# EAGLE board Controller Danu Kartiko K (EAGLE 9.6.1)
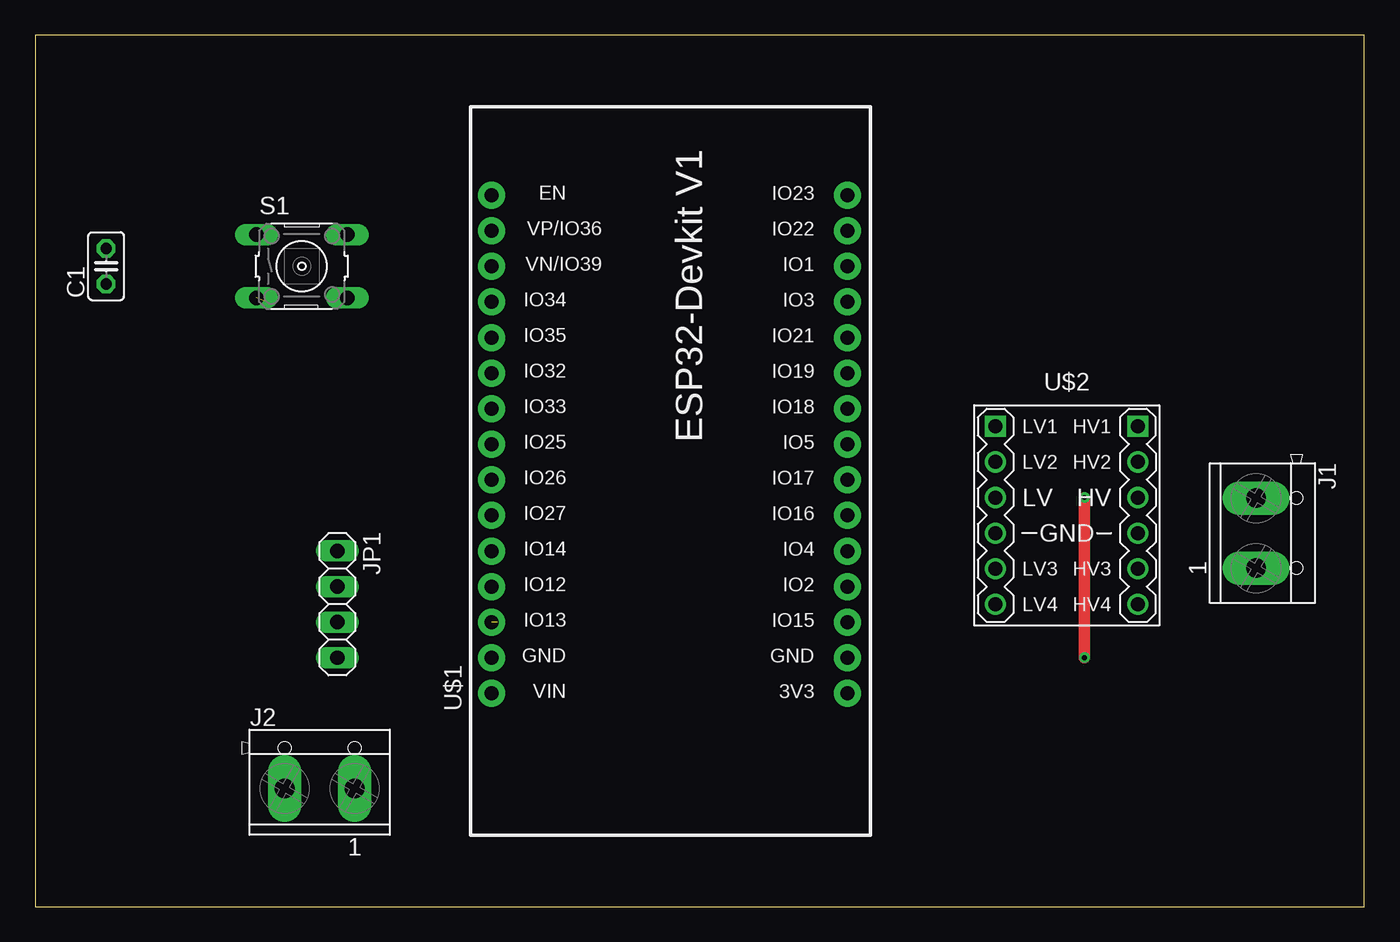
[diagram p0: board, top side]
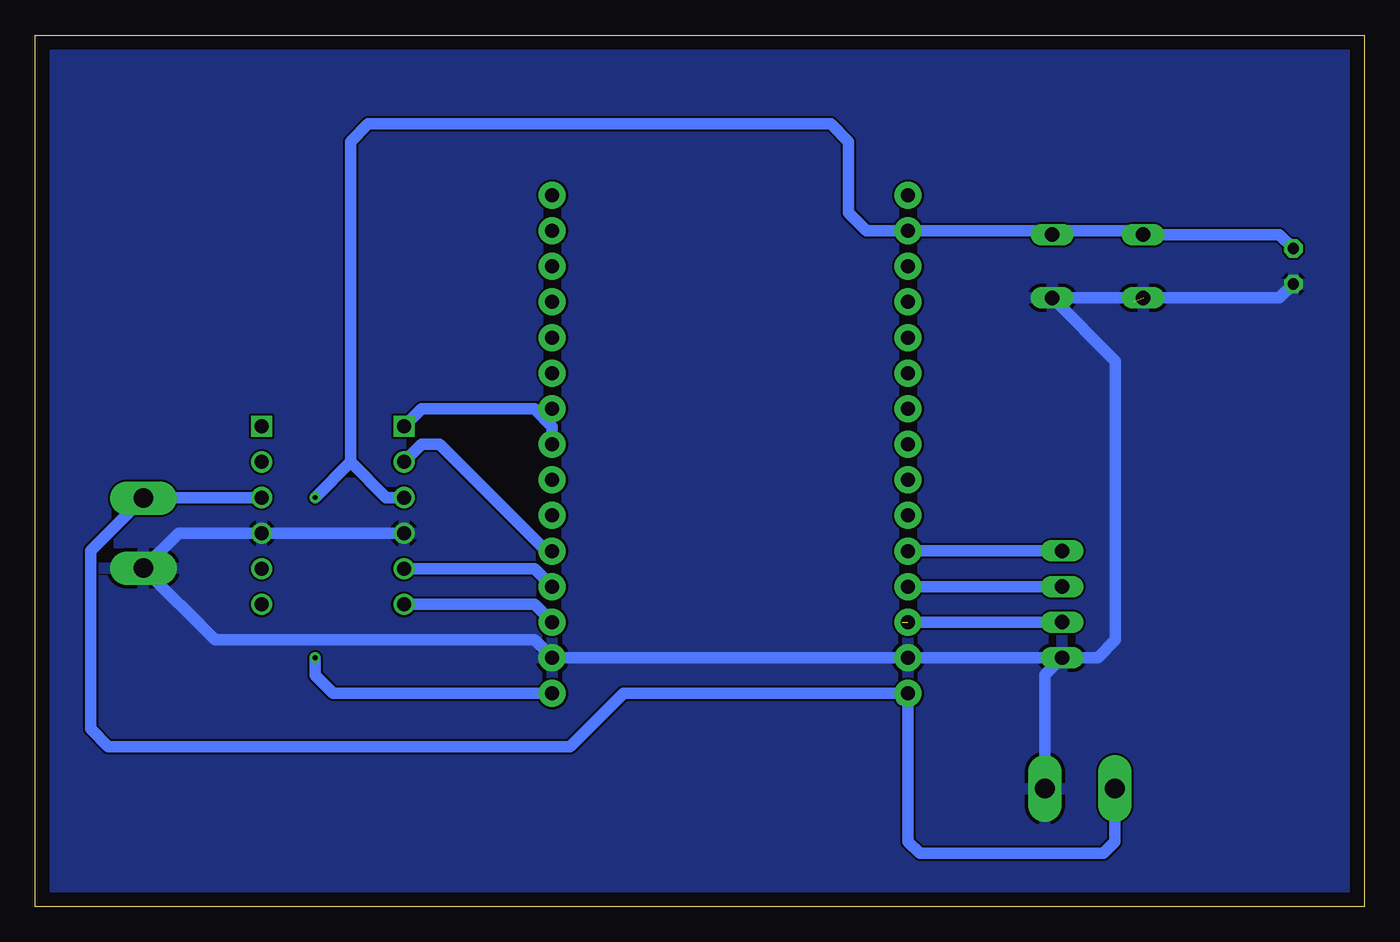
[diagram p1: board, bottom side, seen from below]

Size 94.92 x 62.22 mm. Coordinates in mm from the lower left corner, seen from the top.
Outline: 0,0 94.92,0 94.92,62.22 0,62.22 0,0
Copper layers (1*16): Top 0.035mm / dielectric 1.5mm / Bottom 0.035mm
Design rules "default": minimum track width 6mil, minimum drill 0.35mm, track to track 6mil, track to pad 6mil, pad to pad 6mil, via to via 6mil, smd to smd 6mil, copper to edge 40mil, drill to drill 6mil, minimum pad ring 10mil, minimum via ring 8mil, stop-mask expansion 4mil, vias tented up to drill 0mil, thermal gap 10mil

## Footprints (pad centres in the part's own frame; a part is rotated, then mirrored left to right if it is on the bottom)
C025-025X050 = drill 0.813 octagon: 1 -1.27,0; 2 1.27,0
TERMINAL_BLOCK_2P_5 = drill 1.4 pad 2.38 long: 1 2.5,-0.45; 2 -2.5,-0.45
1X04 = drill 1.016 long: 1 -3.81,0; 2 -1.27,0; 3 1.27,0; 4 3.81,0
B3F-10XX = drill 1.016 long: 1 -3.251,2.261; 2 3.251,2.261; 3 -3.251,-2.261; 4 3.251,-2.261
ESP32-DEVKITV1 = drill 1 pad 1.93: 3V3 -16.52,-12.27; D1 13.96,-12.27; D2 -8.9,-12.27; D3 11.42,-12.27; D4 -6.36,-12.27; D5 1.26,-12.27; D12 -8.9,13.135; D13 -11.44,13.135; D14 -6.36,13.135; D15 -11.44,-12.27; D16 -3.82,-12.27; D17 -1.28,-12.27; D18 3.8,-12.27; D19 6.34,-12.27; D21 8.88,-12.27; D22 16.5,-12.27; D23 19.04,-12.27; D25 1.26,13.135; D26 -1.28,13.135; D27 -3.82,13.135; D32 6.34,13.135; D33 3.8,13.135; D34 11.42,13.135; D35 8.88,13.135; D36 16.5,13.135; D39 13.96,13.135; EN 19.04,13.135; GND@1 -13.98,13.135; GND@2 -13.98,-12.27; VIN -16.52,13.135
LEVEL-SHIFTER-4CH = drill 1 square: J1.1 -5.08,6.35; J2.1 5.08,6.35 | drill 1: J1.2 -5.08,3.81; J1.3 -5.08,1.27; J1.4 -5.08,-1.27; J1.5 -5.08,-3.81; J1.6 -5.08,-6.35; J2.2 5.08,3.81; J2.3 5.08,1.27; J2.4 5.08,-1.27; J2.5 5.08,-3.81; J2.6 5.08,-6.35

## Placement (x,y rotation side)
C1  [C025-025X050]  5.08,45.72 90 top
J1  CON_TERMINAL_BLOCK_02-5MM  [TERMINAL_BLOCK_2P_5]  87.63,26.67 270 top
J2  CON_TERMINAL_BLOCK_02-5MM  [TERMINAL_BLOCK_2P_5]  20.32,8.89 0 top
JP1  [1X04]  21.59,21.59 270 top
S1  [B3F-10XX]  19.05,45.72 0 top
U$1  ESP32DEVKITV1  [ESP32-DEVKITV1]  45.72,31.75 90 top
U$2  LEVEL-SHIFTER-4CH  [LEVEL-SHIFTER-4CH]  73.66,27.94 0 top

## Library data of the parts
C1 = rcl; SPICEPREFIX: C
J1 J2 = tblok
JP1 = pinhead
S1 = switch-omron; MPN: B3F-1000; OC_FARNELL: 176432; OC_NEWARK: 36M3542
U$1 = esp32-devkitv1
U$2 = diy-model

## Nets
GND: C1.1 J1.1 J2.1 JP1.4 S1.3 S1.4 U$1.GND@1 U$1.GND@2 U$2.J1.4 U$2.J2.4
HV: J1.2 J2.2 U$1.VIN U$2.J2.3
LV: C1.2 S1.1 S1.2 U$1.3V3 U$1.D36 U$2.J1.3
LV1: U$1.D5 U$2.J1.1
LV2: U$1.D4 U$2.J1.2
LV3: U$1.D2 U$2.J1.5
LV4: U$1.D15 U$2.J1.6
OUT1: JP1.1 U$1.D14
OUT2: JP1.2 U$1.D12
OUT3: JP1.3 U$1.D13

## Tracks (layer width: path | path; a pad name or v marks a point on that pad's centre or on a via)
GND  (1 unrouted)
  Bottom 0.813: S1.3 6.07,43.46 C1.1 | 16.51,43.18 16.79,43.46 S1.4 17.78,38.94 17.78,19.05 19.05,17.78 JP1.4 | JP1.4 U$1.GND@1 U$1.GND@2 | J2.1 22.82,16.55 JP1.4 | U$1.GND@2 | U$1.GND@2 59.27,19.05 82.06,19.05 J1.1 84.68,26.67 U$2.J2.4 U$2.J1.4
  pour Bottom: 0,62.23 95,62.23 95,0 0,0
HV
  Bottom 0.813: 33.02,14.79 U$1.VIN | 87.14,29.21 J1.2 | U$1.VIN 52.91,15.23 56.7,11.43 89.69,11.43 90.96,12.7 90.96,25.4 87.15,29.21 87.14,29.21 | U$2.J2.3 87.14,29.21 | J2.2 17.82,4.63 18.64,3.81 31.75,3.81 32.59,4.64 U$1.VIN
LV  (via drill 0.35)
  Top 0.813: v74.93,17.78 v74.93,29.21
  Bottom 0.813: 22.57,48.25 U$1.D36 35.55,48.25 36.83,49.53 36.83,54.61 38.1,55.88 71.12,55.88 72.39,54.61 72.39,31.75 | 22.57,48.25 S1.2 | 22.57,48.25 16.07,48.25 S1.1 6.07,47.98 C1.2 | 72.39,31.75 69.85,29.21 U$2.J1.3 | U$1.3V3 73.65,15.23 74.93,16.51 v74.93,17.78 | v74.93,29.21 72.39,31.75
LV1
  Bottom 0.813: U$1.D5 57.99,34.28 59.27,35.56 67.31,35.56 U$2.J1.1
LV2
  Bottom 0.813: U$1.D4 58.41,25.39 66.04,33.02 67.31,33.02 U$2.J1.2
LV3
  Bottom 0.813: U$1.D2 59.27,24.13 U$2.J1.5
LV4
  Bottom 0.813: U$1.D15 59.27,21.59 U$2.J1.6
OUT1
  Bottom 0.813: JP1.1 32.58,25.4 U$1.D14
OUT2
  Bottom 0.813: JP1.2 32.58,22.86 U$1.D12
OUT3  (1 unrouted)
  Bottom 0.813: JP1.3 33.02,20.32